# Altium PCB Kimiya Board.PcbDoc
Units mil, origin at the board's own origin, x right, y up, seen from the top; angles counter-clockwise.
Board outline 6000 x 4000 mil, 2 copper layers (Top Layer, Bottom Layer); 8 components, 62 nets, 24 pads, 0 vias.
Unrouted connection lines stored in the file: 14.
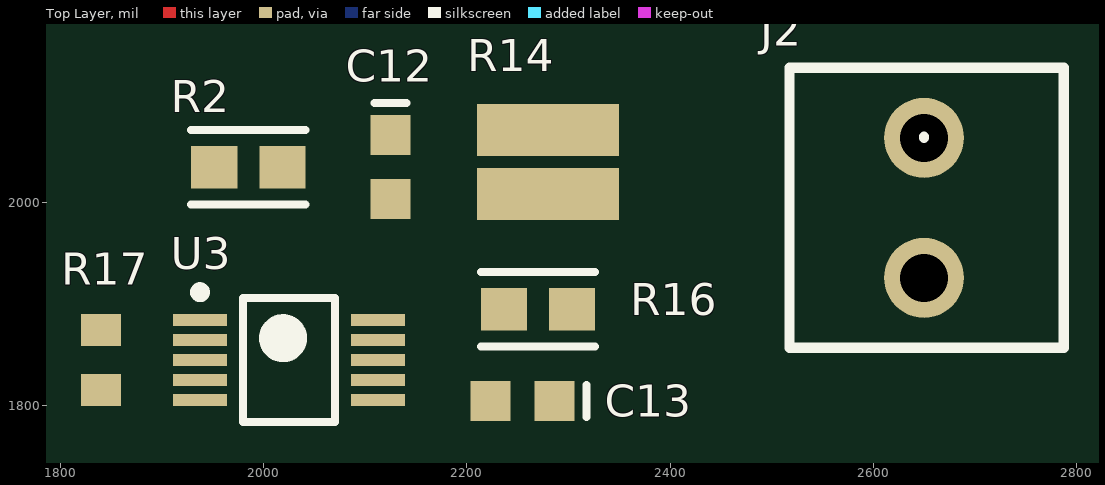
[diagram p0: Top Layer view]
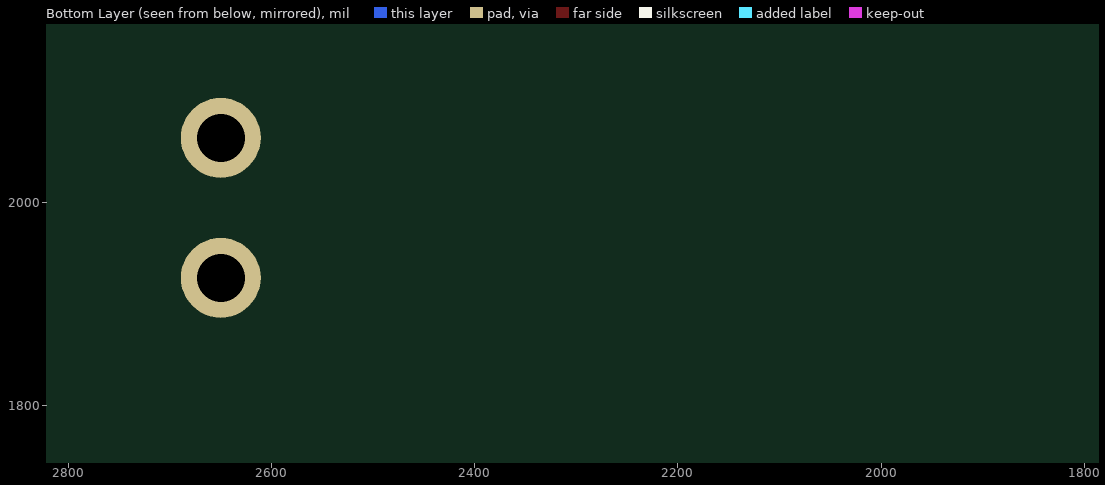
[diagram p1: Bottom Layer view, seen from below]

## Layer stack, top to bottom
Top Solder: solder mask 0.4, Solder Resist, Dk 3.5
Top Layer: signal copper 1.4
Dielectric 1: dielectric 12.6, FR-4, Dk 4.8
Bottom Layer: signal copper 1.4
Bottom Solder: solder mask 0.4, Solder Resist, Dk 3.5

## Board outline
1000,1000 7000,1000 7000,5000 1000,5000

## Design rules (kind name [scope] priority, off if disabled: settings)
Clearance [All] p1: gap=10 ignorepadtopadclearanceinfootprint=TRUE except(0: Arc-Hole Track-Hole SMDPad-Hole THPad-Hole Via-Hole Fill-Hole Poly-Hole Region-Hole Text-Hole; 5: Arc-Arc Arc-Track Arc-SMDPad Arc-THPad Track-Track Track-SMDPad Track-THPad SMDPad-THPad; 19.68: THPad-THPad)
PolygonConnect [All] p1: connectstyle=Relief reliefconductorwidth=10 reliefentries=4 polygonreliefangle="90 Angle" airgapwidth=10
RoutingVias [All] p1: holewidth=28 width=50 viastyle="Through Hole" minholewidth=28 minwidth=50 maxholewidth=28 maxwidth=50
SolderMaskExpansion [All] p1: expansion=4 istentingtop=FALSE
Width [All] p1: maxlimit=10 minlimit=5 preferedwidth=10 minimp=50.000000 maximp=50.000000 favimp=50.000000
30 further rules are at their usual default settings.

## Classes and differential pairs
channel class "Current Sensors": P1 P2 P3 P4
net class Motor_Reset[1..4]: Motor_Reset1 Motor_Reset2 Motor_Reset3 Motor_Reset4
net class Motor_Alert[1..4]: Motor_Alert1 Motor_Alert2 Motor_Alert3 Motor_Alert4
net class Motor_ADC[1..4]: Motor_ADC1 Motor_ADC2 Motor_ADC3 Motor_ADC4

## Components (designator, comment, footprint, x,y, rotation, side; value= is the part's Value field where it differs from the comment)
C12 "0.1uF, 50V, 10%, X7R, 0603" "CAPC1608N(0603\")" 2125,2035 r270 top (schematic designator C1)
C13 "10 nF, 50V 0603 SMD, Ceramic" "CAPC1608N(0603\")" 2255,1805 r180 top value=10nF (schematic designator C2)
J2 "2x1 Terminal Block 3.5mm" "2x1 Terminal Block 3.5mm-Footprint-1" 2650,1995 r270 top (schematic designator J1)
R2 "ERJ3EKF10R0V" FP-ERJ3EK-IPC_A 1985,2035 r0 top
R14 "3mR, 1%, 1W, 1206" RESC1632X07M 2280,2040 r90 top (schematic designator R1)
R16 "ERJ3EKF10R0V" FP-ERJ3EK-IPC_A 2270,1895 r0 top (schematic designator R3)
R17 "RC0603FR-0710KL" RESC1608X55X25ML10T15 1840,1845 r90 top (schematic designator R4)
U3 "INA381A3IDGSR" TSSOP50P490X110-10N 2025,1845 r0 top (schematic designator U1)

## Footprints (in the part's own frame and the unit in brackets; to place one, negate y for a bottom-side part, rotate by r counter-clockwise, add the part's x,y. Pads: shape width x height; smd on the part's side, far side on the other; paste and mask are expansions set on the pad)
"2x1 Terminal Block 3.5mm-Footprint-1" [mm]
  round 2 hole 1.2: 1(-1.75,0) 2(1.75,0)
  silkscreen extent -3.5,-3.37 3.5,3.49, body extent -3.57,-4.32 4.08,4.08, height 13.05
"CAPC1608N(0603\")" [mm] "Chip Capacitor, Body 1.6x0.8mm (0603\"), IPC Medium Density"
  rect 1x1 smd: 1(-0.8,0) 2(0.8,0)
  silkscreen extent -1.6,-0.4 -1.6,0.4, body extent -0.8,-0.4 0.8,0.4, height 0.9
FP-ERJ3EK-IPC_A [mil]
  rect 45.53x41.82 smd paste+0 mask+0: 1(-33.5,0) 2(33.5,0)
  silkscreen extent -56,-37 56,37, body extent -76,-41 76,41, height 10
RESC1608X55X25ML10T15 [mm] "Chip Resistor, 2-Leads, Body 1.60x0.80mm, IPC Low Density"
  rect 0.8x1 smd: 1(-0.75,0) 2(0.75,0)
  body extent -0.85,-0.45 0.85,0.45, height 0.55
RESC1632X07M [mm] "Chip Resistor, 2-Leads, Body 1.60x3.20mm, IPC Low Density"
  rect 1.3x3.55 smd: 1(-0.8,0) 2(0.8,0)
  body extent -0.9,-1.73 0.9,1.73, height 0.7
TSSOP50P490X110-10N [mm] "TSSOP, 10-Leads, Body 3.00x3.00mm, Pitch 0.50mm, IPC Medium Density"
  rect 1.35x0.3 smd: 1(-2.225,1) 2(-2.225,0.5) 3(-2.225,0) 4(-2.225,-0.5) 5(-2.225,-1) 6(2.225,-1) 7(2.225,-0.5) 8(2.225,0) 9(2.225,0.5) 10(2.225,1)
  silkscreen extent -2.35,-1.55 1.15,1.82, body extent -2.45,-1.55 2.45,1.55, height 1.1

## Part data
C12: library part CMP-006-0007-1, "0.1µF ±10% Ceramic Capacitor X7R 0603 (1608 Metric)", Capacitance=0.1µF, Operating Temperature="-55°C ~ 125°C", Package / Case="0603 (1608 Metric)", Component Type=Standard, ComponentLink1Description=Digi-Key, ComponentLink1URL=https://www.digikey.ca/product-detail/en/tdk-corporation/C1608X7R1H104M080AA/445-5098-1-ND/2093713, Created By="Poorna Chander Kalidas", Design Item ID="0.1uF, 50V, 10%, X7R, 0603", Mounting Type="Surface Mount, MLCC", Pin Count=2, Source=AUVic_Schematic_Library_Capacitors.SchLib
C13: library part CMP-006-0010-1, "Capacitor, Ceramic, 50V, +/- 10%, 0603 SMD", Component Type=Standard, Created By=Gabriel, Design Item ID="10 nF, 50V 0603 SMD, Ceramic", MFG=Samsung, MFG#=GRM188R61A475KE15D, PackageDescription="Chip Capacitor", Pin Count=2, Published=16-06-23, Publisher=AUVic, Source=AUVic_Schematic_Library_Capacitors.SchLib
J2: library part CMP-00117-2, "P=3.5mm Screw terminal RoHS", LCSC Part #=C474892, Created By="Miguel Manguerra"
R2 R16: library part CMP-00034-2, "PANASONIC - ERJ3EKF10R0V - SMD Chip Resistor, 0603 [1608 Metric], 10 ohm, ERJ3EK Series, 75 V, Thick Film, 100 mW", Case Code (Imperial)=0603, Case Code (Metric)=1608, Max Operating Temperature=155°C, Max Power Dissipation=100mW, Min Operating Temperature=-55°C, Package Quantity=5000, Resistance=10R, Temperature Coefficient=100ppm/°C, Tolerance=1%, Voltage Rating=75V, Case/Package=0603, Composition="Thick Film", Contact Plating=Tin, Depth=0.8mm, Features="Automotive AEC-Q200", Height=0.45mm, Lead Free="Lead Free", Length=1.6mm, Military Standard=Not, Mount="Surface Mount", Number of Pins=2, Number of Terminations=2, Packaging="Tape and Reel", Power Rating=100mW, Radiation Hardening=No, REACH SVHC="No SVHC", Termination=SMD/SMT, Voltage Rating (DC)=75V, Width=0.8mm, Working Voltage=75V
R14: library part CMP-00122-4, "3 mOhms ±1% 1W Chip Resistor Wide 1206 (3216 Metric), 0612", Resistance=3mR
R17: library part CMP-00037-1, "Res General Purpose Thick Film 0603 10K Ohm 1% 1/10W ±100ppm/°C Molded SMD Paper T/R", Case Code (Imperial)=0603, Case Code (Metric)=1608, Max Operating Temperature=155°C, Min Operating Temperature=-55°C, Power Rating=100mW, Resistance=10kR, Temperature Coefficient=100ppm/°C, Tolerance=1%, Voltage Rating=75V, Voltage Rating (DC)=50V, Case/Package=0603, Composition="Thick Film", Depth=0.8mm, Height=0.45mm, Lead Free="Lead Free", Lead Pitch=0.3mm, Length=1.6mm, Military Standard=Not, Number of Pins=2, Packaging="Tape and Reel", REACH SVHC="No SVHC", Termination=SMD/SMT, Weight=7.1E-05oz, Width=0.8mm
U3: library part CMP-00120-1, "26V, 350kHz current sense amplifier w/ integrated over-current comparator 10-VSSOP -40 to 125"

## Nets (pads, with @x,y where several pads share a name; then routed paths per layer and width w, separated by ;. In a path a pad name is that pad's centre, name@x,y a point inside that pad or via, vN(x,y) a via of type N, cw(c..) or ccw(c..) an arc to the next point about the centre after c; other vN are vias at no path point)
3V3: R17.2 U3.2 U3.7
5V: 
Cell_ADC_1: 
Cell_ADC_2: 
GND: C13.1 J2.2 U3.5
MOTOR: C12.1 J2.1 R14.2 R16.2
Motor_ADC1: 
Motor_ADC2: 
Motor_ADC3: 
Motor_ADC4: 
Motor_Alert1: 
Motor_Alert2: 
Motor_Alert3: 
Motor_Alert4: 
Motor_PWM_1: 
Motor_PWM_2: 
Motor_PWM_3: 
Motor_PWM_4: 
Motor_Reset1: 
Motor_Reset2: 
Motor_Reset3: 
Motor_Reset4: 
NetC1_1: 
NetC1_2: 
NetC2_2: C13.2 U3.8 U3.9
NetC8_2: 
NetCN1_2: 
NetCN1_3: 
NetCN1_5: 
NetCN3_2: 
NetCN3_3: 
NetCN3_4: 
NetCN3_5: 
NetCN4_2: 
NetCN4_3: 
NetCN4_4: 
NetCN4_5: 
NetCN4_6: 
NetCN4_7: 
NetCN4_8: 
NetCN4_9: 
NetCN4_10: 
NetCN4_11: 
NetD1_2: 
NetD2_2: 
NetD3_2: 
NetJ1_2: 
NetJ1_3: 
NetR1_1: 
NetR2_1: R2.1 U3.1
NetR3_1: R16.1 U3.10
NetR4_1: R17.1 U3.3
NetR15_P1_1: 
NetR15_P2_1: 
NetR15_P3_1: 
NetR15_P4_1: 
NetR16_P1_1: 
NetR16_P2_1: 
NetR16_P3_1: 
NetR16_P4_1: 
NetU1_4: U3.4
VBATT: C12.2 R2.2 R14.1
pads on no net: U3.6